# Altium PCB Põhiplaat.PcbDoc
Units mm, origin at the board's own origin, x right, y up, seen from the top; angles counter-clockwise.
Board outline 99 x 99 mm, 2 copper layers (Top Layer, Bottom Layer); 71 components, 98 nets, 428 pads, 89 vias.
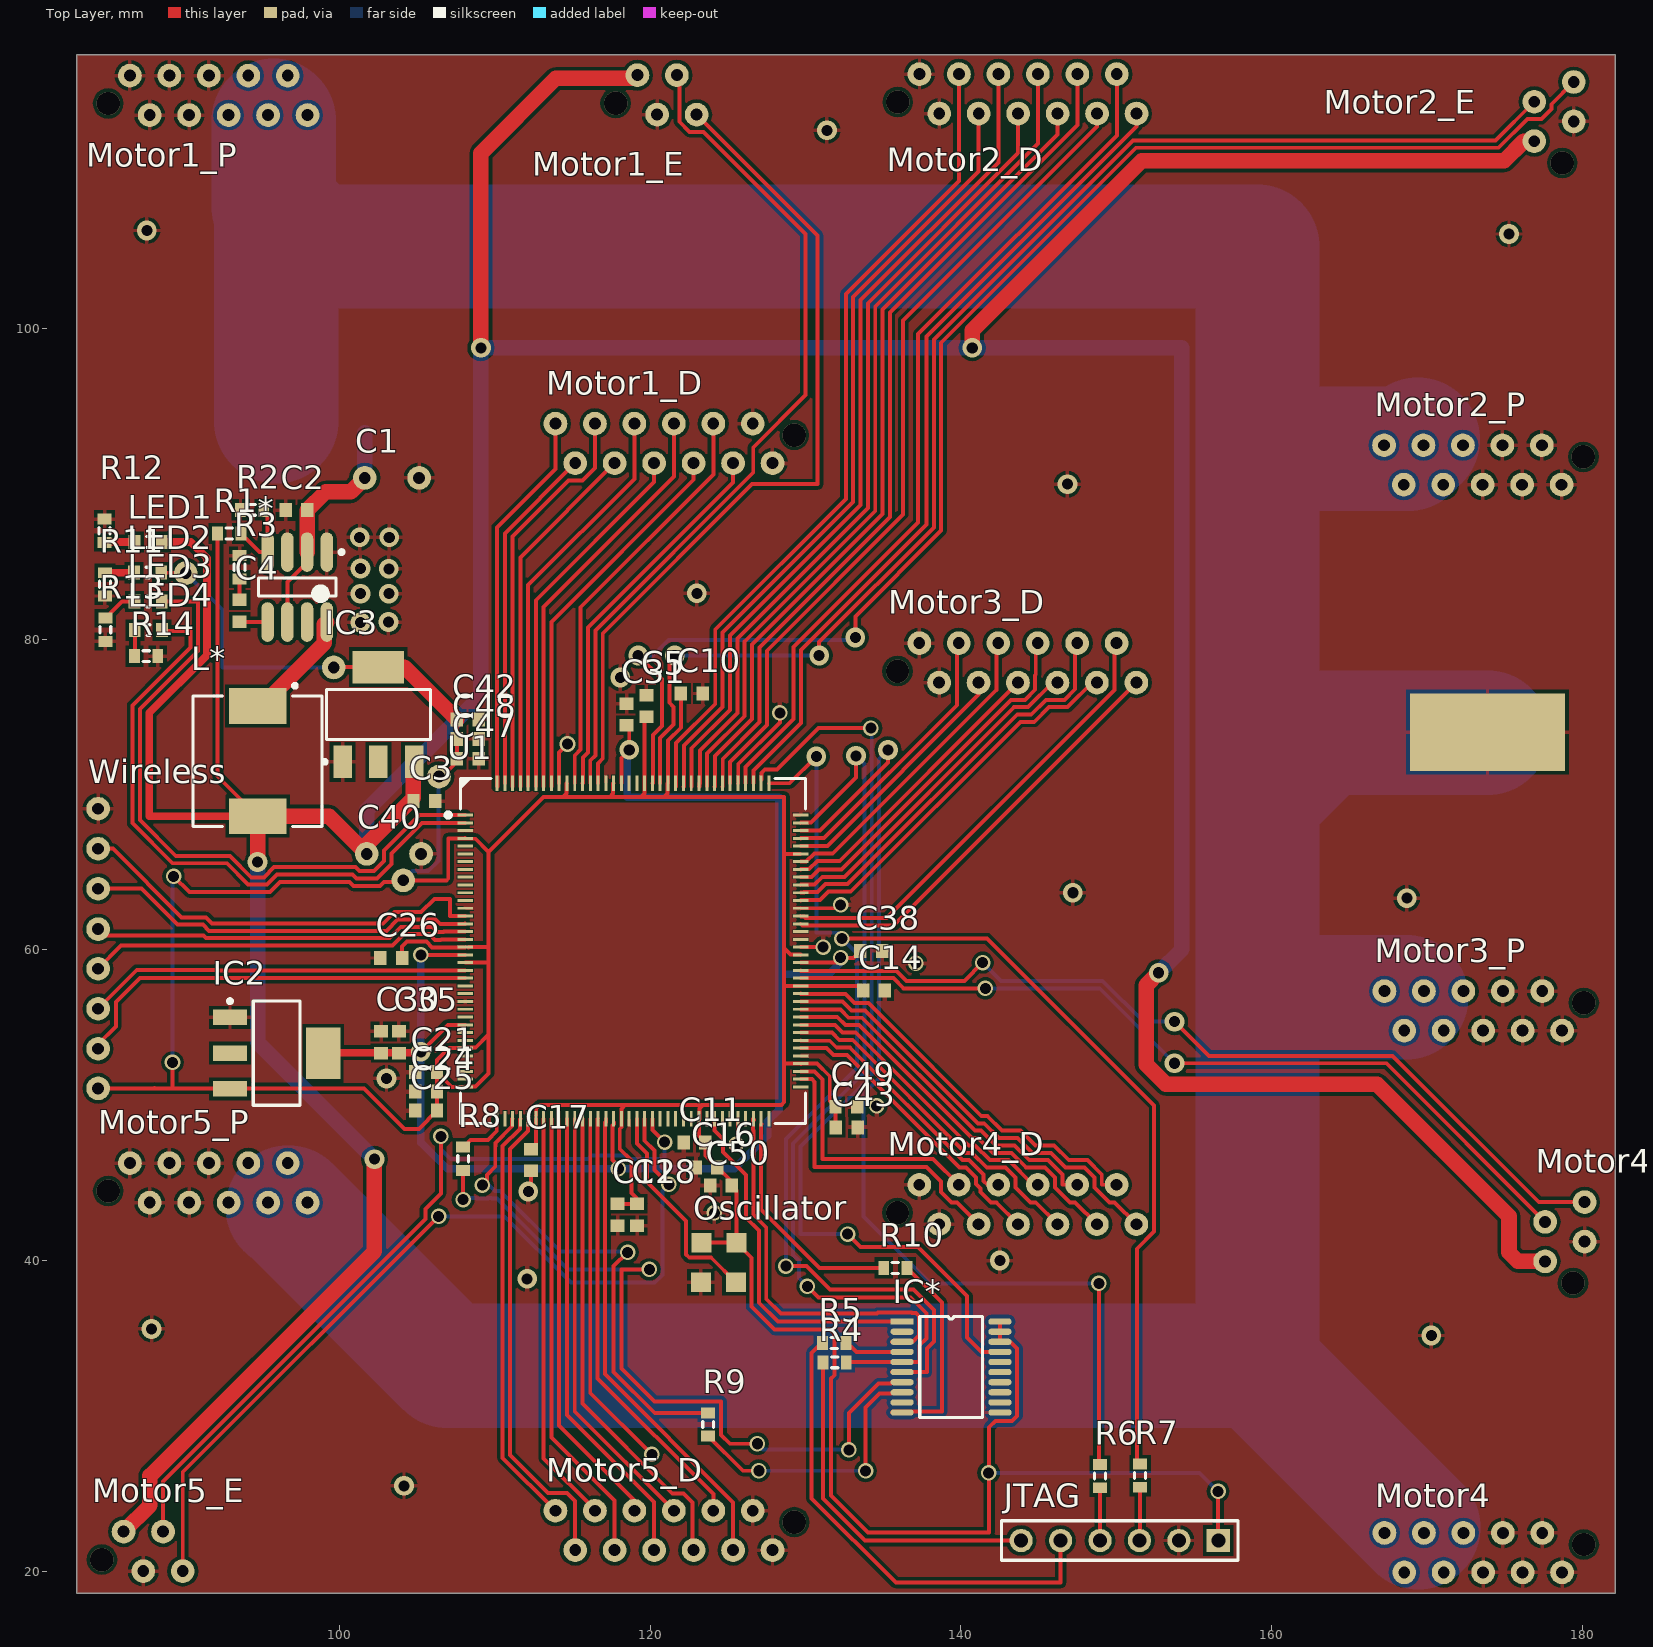
[diagram p0: Top Layer view]
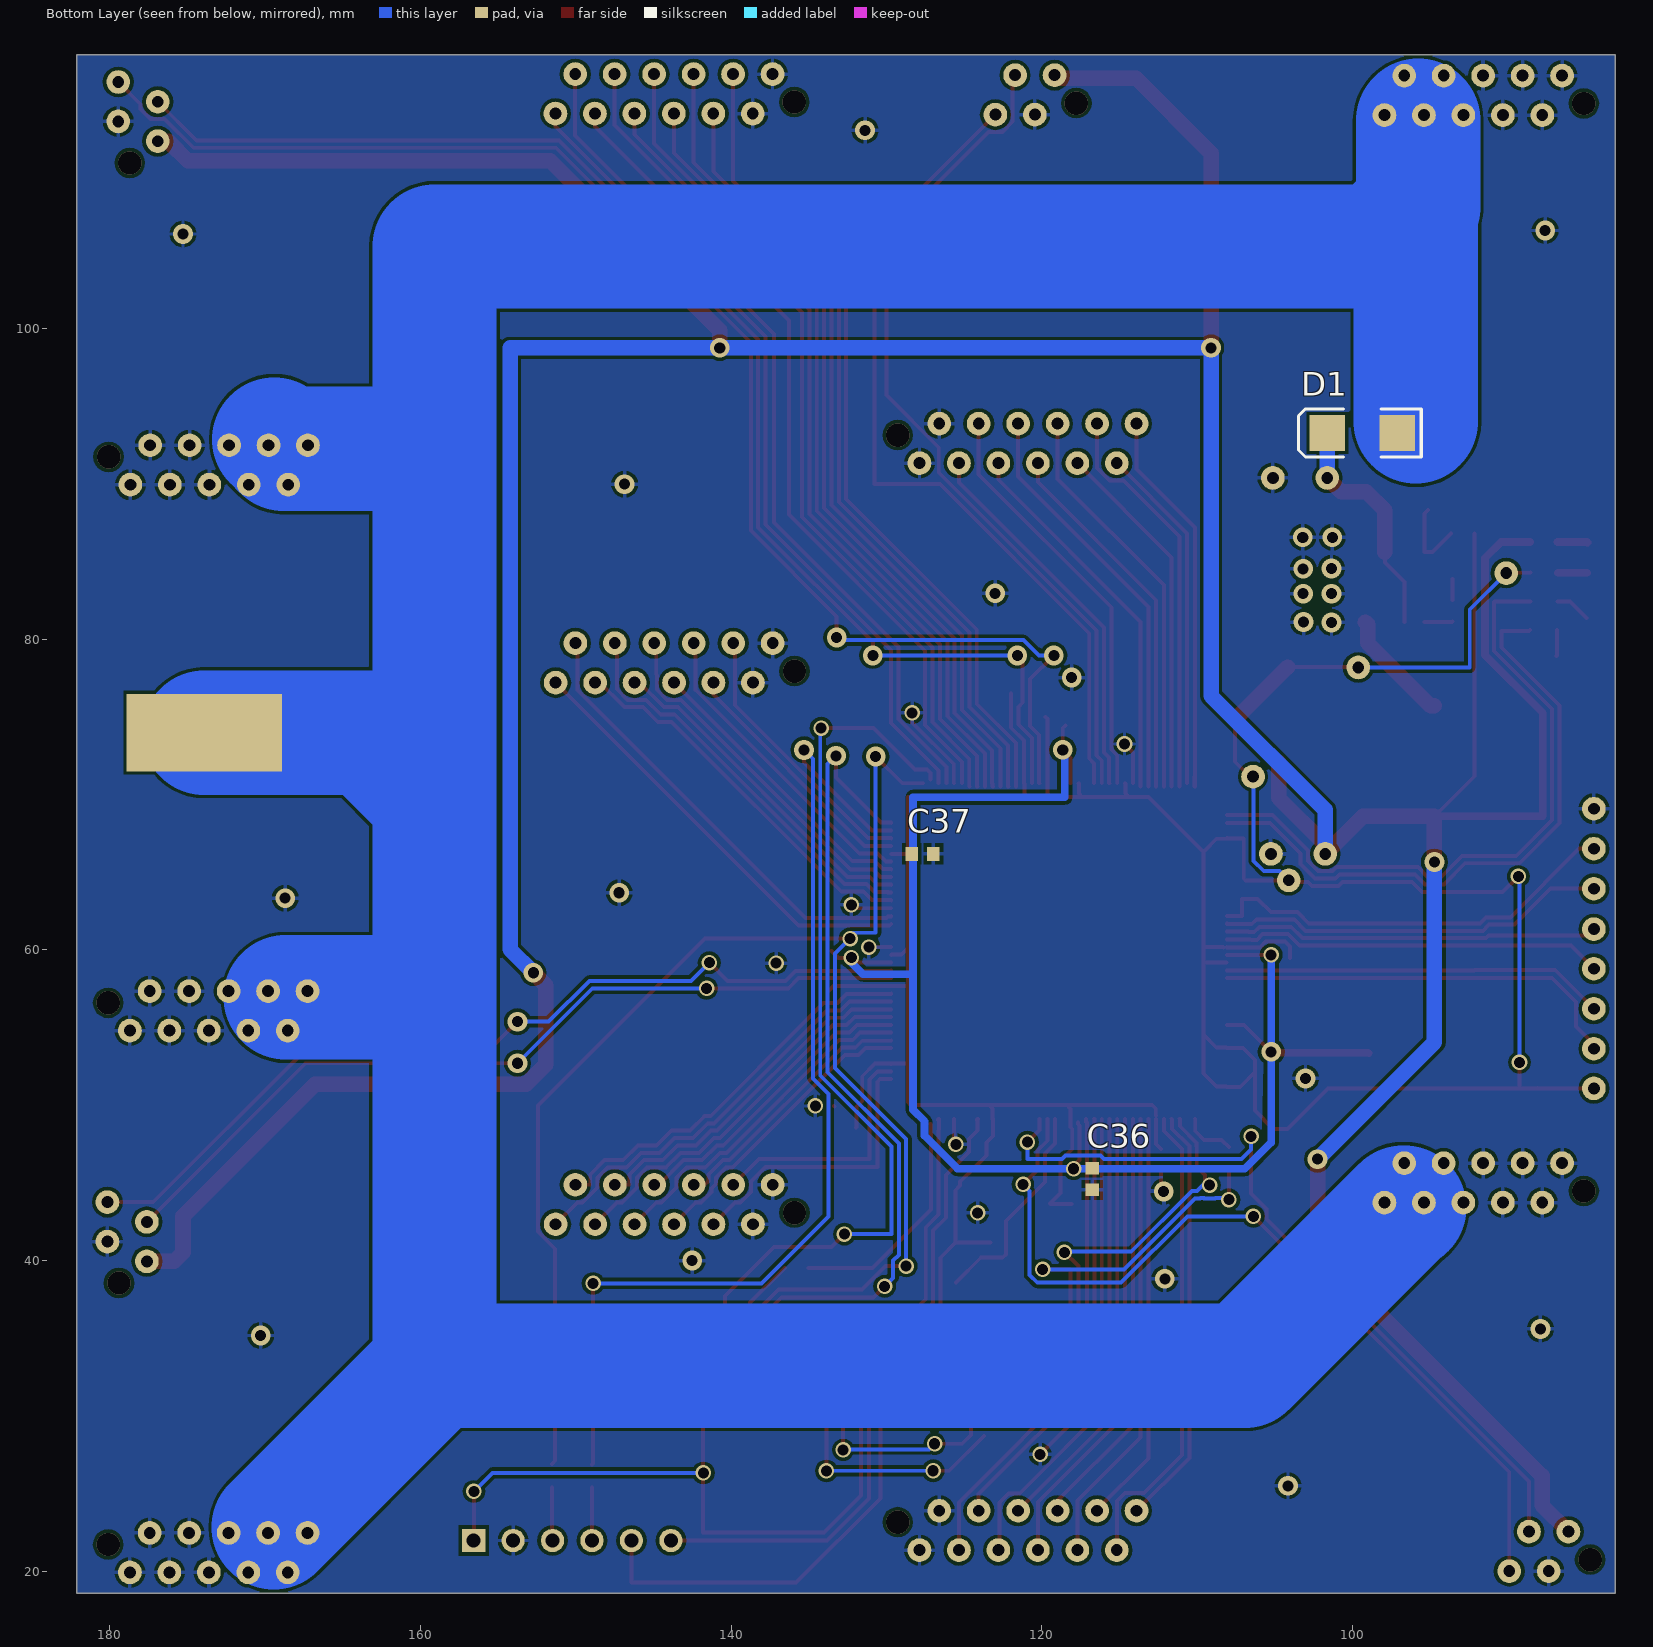
[diagram p1: Bottom Layer view, seen from below]

## Layer stack, top to bottom
Top Layer: signal copper 0.0356
Dielectric: dielectric 0.32, FR-4, Dk 4.8
Bottom Layer: signal copper 0.0356

## Board outline
83.1,117.6 182.1,117.6 182.1,18.6 83.1,18.6

## Design rules (kind name [scope] priority, off if disabled: settings)
Clearance "U1 clearance" [InComponent('U1')] p1: gap=0.05
Clearance [All] p2: gap=0.22
ComponentClearance [All] p1: gap=0.2 collisioncheckmode=3 verticalgap=0.2 showdistances=FALSE
DiffPairsRouting [All] p1: maxlimit=0.254 minlimit=0.1 mostfreqgap=0.1 maxuncoupledlength=12.7
HoleToHoleClearance [All] p1: gap=0.1 allowstackedmicrovias=TRUE
MinimumSolderMaskSliver [All] p1: minsoldermaskwidth=0.01
PolygonConnect [All] p1: connectstyle=Relief reliefconductorwidth=0.254 reliefentries=4 polygonreliefangle="90 Angle"
RoomDefinition Power [InComponentClass('Power')] p1: confinementstyle=ConfineIn formatcopy=TRUE lockcomponents=FALSE outline 0,0 50.8,0 50.8,25.4 0,25.4
RoomDefinition JTAG [InComponentClass('JTAG')] p2: confinementstyle=ConfineIn formatcopy=TRUE lockcomponents=FALSE outline 183.734,19.526 192.034,19.526 192.034,29.051 183.734,29.051
RoomDefinition BANK3 [InComponentClass('BANK3')] p3: confinementstyle=ConfineIn formatcopy=TRUE lockcomponents=FALSE outline 0,0 50.8,0 50.8,25.4 0,25.4
RoomDefinition BANK2 [InComponentClass('BANK2')] p4: confinementstyle=ConfineIn formatcopy=TRUE lockcomponents=FALSE outline 0,0 50.8,0 50.8,25.4 0,25.4
RoomDefinition BANK1 [InComponentClass('BANK1')] p5: confinementstyle=ConfineIn formatcopy=TRUE lockcomponents=FALSE outline 0,0 50.8,0 50.8,25.4 0,25.4
RoomDefinition BANK0 [InComponentClass('BANK0')] p6: confinementstyle=ConfineIn formatcopy=TRUE lockcomponents=FALSE outline 0,0 50.8,0 50.8,25.4 0,25.4
RoutingVias [All] p1: holewidth=0.711 width=1.27 viastyle="Through Hole" minholewidth=0.711 minwidth=1.27 maxholewidth=0.711 maxwidth=1.27
SilkscreenOverComponentPads [All] p1: minsilkscreentomaskgap=0.254
SolderMaskExpansion [All] p1: expansion=0.102
Width [All] p1: maxlimit=8 minlimit=0.254 preferedwidth=0.254 minimp=50.000000 maximp=50.000000 favimp=50.000000
23 further rules are at their usual default settings.

## Classes and differential pairs
component class Power: * C1 C2 C3 C4 C5 C10 C11 C12 C14 C16 C17 C18 C21 C24 C25 C26 C30 C31 C35 C36 C37 C38 C40 C42 C43 C47 C48 C49 C50 D1 IC2 IC3 L* LED1 LED2 Motor1_P Motor2_P Motor3_P Motor4 Motor5_P R1 R2 R3 R11 R12
component class JTAG: IC* JTAG R4 R5 R6 R7 R8 R9
component class BANK0: Motor1_D Motor1_E Motor2_D Motor2_E U1
component class BANK2: Motor5_D Motor5_E Oscillator R10
component class BANK3: LED3 LED4 R13 R14 Wireless
component class BANK1: Motor3_D Motor4_D Motor4_E

## Components (designator, comment, footprint, x,y, rotation, side; value= is the part's Value field where it differs from the comment)
* "NCP3170" NCP3170 97.275,83.35 r270 top
C1 "Cap Pol1" CAPACITOR 101.625,90.375 r0 top
C2 "Cap Semi" 1608[0603] 97.225,88.3 r0 top
C3 "Cap Semi" 1608[0603] 105.461,69.578 r180 top
C4 "Cap Semi" 1608[0603] 93.575,81.825 r270 top
C5 "Cap Semi" 1608[0603] 119.75,75.7 r270 top
C10 "Cap Semi" 1608[0603] 122.675,76.5 r180 top
C11 "Cap Semi" 1608[0603] 122.85,47.6 r0 top
C12 "Cap Semi" 1608[0603] 117.9,42.95 r90 top
C14 "Cap Semi" 1608[0603] 134.4,57.375 r180 top
C16 "Cap Semi" 1608[0603] 123.625,46 r0 top
C17 "Cap Semi" 1608[0603] 112.325,46.475 r90 top
C18 "Cap Semi" 1608[0603] 119.15,42.95 r90 top
C21 "Cap Semi" 1608[0603] 105.575,52.125 r0 top
C24 "Cap Semi" 1608[0603] 105.575,50.875 r0 top
C25 "Cap Semi" 1608[0603] 105.575,49.65 r0 top
C26 "Cap Semi" 1608[0603] 103.325,59.475 r0 top
C30 "Cap Semi" 1608[0603] 102.675,54.05 r270 top
C31 "Cap Semi" 1608[0603] 118.475,75.15 r270 top
C35 "Cap Semi" 1608[0603] 103.825,54.05 r270 top
C36 "Cap Semi" 1608[0603] 116.75,45.25 r90 bottom
C37 "Cap Semi" 1608[0603] 127.675,66.175 r0 bottom
C38 "Cap Semi" 1608[0603] 134.225,59.925 r180 top
C40 "Cap Pol1" CAPACITOR 101.75,66.175 r0 top
C42 "Cap Semi" 1608[0603] 108.25,74.825 r180 top
C43 "Cap Semi" 1608[0603] 132.65,48.575 r180 top
C47 "Cap Semi" 1608[0603] 108.25,72.3 r180 top
C48 "Cap Semi" 1608[0603] 108.25,73.575 r180 top
C49 "Cap Semi" 1608[0603] 132.625,49.9 r180 top
C50 "Cap Semi" 1608[0603] 124.55,44.825 r0 top
D1 "Schottky 1A" SMB 99.37,93.27 r0 bottom
IC2 "NX1117C" NX1117C 95.95,53.35 r0 top
IC3 "LMS8117" LMS8117 102.5,75.15 r90 top
IC* "XF04SVO20" XCF04SVOG20 135.56,36.07 r0 top
JTAG "Header 6" HDR1X6 156.57,21.98 r180 top
L* "Choke" CHOKE 94.725,72.15 r270 top
LED1 "LED 0603" LED 87.675,86.25 r0 top
LED2 "LED 0603" LED 87.65,84.275 r0 top
LED3 "Transmit" LED 87.675,82.425 r0 top
LED4 "Receive" LED 87.7,80.575 r0 top
Motor1_D "uMatchX12" UMATCHX12 113.9,93.87 r180 top
Motor1_E "uMatchx4" "MICROMATCH X4" 119.175,116.3 r0 top
Motor1_P "POWER" UMATCH10X 97.94,113.73 r180 top (schematic designator Motor1)
Motor2_D "uMatchX12" UMATCHX12 151.3,113.83 r0 top
Motor2_E "uMatchx4" "MICROMATCH X4" 176.9,112.05 r90 top
Motor2_P "POWER" UMATCH10X 167.23,92.48 r0 top (schematic designator Motor2)
Motor3_D "uMatchX12" UMATCHX12 151.29,77.2 r0 top
Motor3_P "POWER" UMATCH10X 167.26,57.34 r0 top (schematic designator Motor5)
Motor4 "POWER" UMATCH10X 167.26,22.47 r0 top
Motor4_D "uMatchX12" UMATCHX12 151.29,42.34 r0 top
Motor4_E "uMatchx4" "MICROMATCH X4" 177.6,39.95 r90 top
Motor5_D "uMatchX12" UMATCHX12 113.9,23.9 r180 top
Motor5_E "uMatchx4" "MICROMATCH X4" 86.1,22.55 r0 top
Motor5_P "POWER" UMATCH10X 97.94,43.73 r180 top (schematic designator Motor3)
Oscillator "Oscillator" OSC_FOOTPRINT 120.55,38.15 r270 top
R1 "Res3" J1-0603 92.9,86.8 r180 top
R2 "Res3" J1-0603 94.375,88.325 r0 top
R3 "Res3" J1-0603 93.575,84.625 r270 top
R4 "Res3" J1-0603 131.87,33.45 r0 top
R5 "Res3" J1-0603 131.84,34.7 r0 top
R6 "Res3" J1-0603 148.95,26.13 r90 top
R7 "Res3" J1-0603 151.53,26.16 r90 top
R8 "Res3" J1-0603 107.96,46.55 r270 top
R9 "Res3" J1-0603 123.73,29.45 r270 top
R10 "Res3" J1-0603 135.78,39.53 r0 top
R11 "Res3" J1-0603 84.9,83.525 r90 top
R12 "Res3" J1-0603 84.875,86.975 r270 top
R13 "Res3" J1-0603 84.925,80.6 r270 top
R14 "Res3" J1-0603 87.55,78.9 r0 top
U1 "XC6SLX9" XC6SLX9 116.35,61.45 r0 top
Wireless "Pinheader 2.54mm" "PINHEADER 2.54MM" 84.26,57.01 r90 top

## Footprints (in the part's own frame and the unit in brackets; to place one, negate y for a bottom-side part, rotate by r counter-clockwise, add the part's x,y. Pads: shape width x height; smd on the part's side, far side on the other; paste and mask are expansions set on the pad)
1608[0603] [mm] "Chip Capacitor, Body 1.6x0.8mm, IPC High Density"
  rect 0.8x0.9 smd: 1(-0.7,0) 2(0.7,0)
  body extent -0.87,-0.48 0.87,0.48, height 1.3
CAPACITOR [mil]
  round 60 hole 30: 1(0,0) 2(137.8,0)
CHOKE [mm] "Precision Wire Wound Inductor, 2-Leads, Body 8,2x8,2mm, IPC Medium Density"
  rect 2.3x3.7 smd: 1(-3.55,0) 2(3.55,0)
  silkscreen extent -4.97,-4.15 4.2,4.15, body extent -4.15,-4.15 4.15,4.15, height 2.29
HDR1X6 [mm] "Connector; Header; 6 Position"
  rect 1.5x1.5 hole 0.9: 1(0,0)
  round 1.5 hole 0.9: 2(2.54,0) 3(5.08,0) 4(7.62,0) 5(10.16,0) 6(12.7,0)
  silkscreen extent -1.27,-1.27 13.97,1.27
J1-0603 [mm] "Chip Resistor, Body 1.6x0.8mm, IPC High Density"
  rect 0.7x0.9 smd: 1(-0.75,0) 2(0.75,0)
  silkscreen extent -0.2,-0.35 0.2,0.35, body extent -0.85,-0.48 0.85,0.48, height 0.9
LED [mm] "LED 0603, SMD"
  rect 0.75x0.9 smd: 1(-0.875,0) 2(0.875,0)
  silkscreen extent -0.1,-0.35 0.1,0.35, body extent -0.8,-0.4 0.8,0.4, height 0.8
LMS8117 [mm] "LDO 5V ->3V3"
  rect 2.1x1.2 smd: 1(-3.05,2.3) 2(-3.05,0) 3(-3.05,-2.3)
  rect 2.1x3.3 smd: 4(3.05,0)
  silkscreen extent -3.17,-3.35 1.6,3.57, body extent -1.88,-3.35 1.88,3.35, height 1.55
"MICROMATCH X4" [mil] "Micromatch x4"
  round 60 hole 30: 1(0,0) 2(100,0) 3(50,-100) 4(150,-100)
NCP3170 [mm] "Voltage Regulator 18V-3V3"
  oval 2.55x0.8 smd: 1(-2.25,1.905) 2(-2.25,0.635) 3(-2.25,-0.635) 4(-2.25,-1.905) 5(2.25,-1.905) 6(2.25,-0.635) 7(2.25,0.635) 8(2.25,1.905)
  silkscreen extent -2.37,-2.5 0.72,2.98, body extent -2,-2.5 2,2.5, height 1.75
NX1117C [mm] "LDO 3V3->1.2V"
  rect 2.2x1 smd: 1(-3,2.3) 2(-3,0) 3(-3,-2.3)
  rect 2.2x3.3 smd: 4(3,0)
  silkscreen extent -3.12,-3.35 1.5,3.47, body extent -1.85,-3.35 1.85,3.35, height 1.8
OSC_FOOTPRINT [mm]
  rect 1.24x1.29 smd: 1(-3,2.75) 2(-0.45,2.71) 3(-0.45,4.96) 4(-3,5)
"PINHEADER 2.54MM" [mil]
  round 60 hole 30: 1(-233.27,-7.87) 2(-132.87,-7.87) 3(-31.5,-7.87) 4(69.88,-7.87) 5(170.28,-7.87) 6(272.64,-7.87) 7(374.02,-7.87) 8(475.39,-7.87)
SMB [mm] "DO-214-AA/SMB; 2 C-Bend Leads; Body 5.3 x 3.6 mm, inc. leads (LxW)"
  rect 2.3x2.3 smd: 1(-2.25,0) 2(2.25,0)
  silkscreen extent -3.8,-1.55 4.1,1.55
UMATCH10X [mil]
  round 60 hole 30: 1(0,0) 2(100,0) 3(200,0) 4(300,0) 5(400,0) 6(50,-100) 7(150,-100) 8(250,-100) 9(350,-100) 10(450,-100)
UMATCHX12 [mil]
  round 60 hole 30: 1(-550,100) 2(-450,100) 3(-350,100) 4(-250,100) 5(-150,100) 6(-50,100) 7(-500,0) 8(-400,0) 9(-300,0) 10(-200,0) 11(-100,0) 12(0,0)
XC6SLX9 [mm]
  rect 1.006x0.19 smd: 1(-8.257,7.226) 2(-8.257,6.726) 3(-8.257,6.226) 4(-8.257,5.726) 5(-8.257,5.226) 6(-8.257,4.726) 7(-8.257,4.226) 8(-8.257,3.726) 9(-8.257,3.226) 10(-8.257,2.726) 11(-8.257,2.226) 12(-8.257,1.726) 13(-8.257,1.226) 14(-8.257,0.726) 15(-8.257,0.226) 16(-8.257,-0.274) 17(-8.257,-0.774) 18(-8.257,-1.274) 19(-8.257,-1.774) 20(-8.257,-2.274) 21(-8.257,-2.774) 22(-8.257,-3.274) 23(-8.257,-3.774) 24(-8.257,-4.274) 25(-8.257,-4.774) 26(-8.257,-5.274) 27(-8.257,-5.774) 28(-8.257,-6.274) 29(-8.257,-6.774) 30(-8.257,-7.274) 31(-8.257,-7.774) 32(-8.257,-8.274) 33(-8.257,-8.774) 34(-8.257,-9.274) 35(-8.257,-9.774) 36(-8.257,-10.274) 73(13.337,-10.274) 74(13.337,-9.774) 75(13.337,-9.274) 76(13.337,-8.774) 77(13.337,-8.274) 78(13.337,-7.774) 79(13.337,-7.274) 80(13.337,-6.774) 81(13.337,-6.274) 82(13.337,-5.774) 83(13.337,-5.274) 84(13.337,-4.774) 85(13.337,-4.274) 86(13.337,-3.774) 87(13.337,-3.274) 88(13.337,-2.774) 89(13.337,-2.274) 90(13.337,-1.774) 91(13.337,-1.274) 92(13.337,-0.774) 93(13.337,-0.274) 94(13.337,0.226) 95(13.337,0.726) 96(13.337,1.226) 97(13.337,1.726) 98(13.337,2.226) 99(13.337,2.726) 100(13.337,3.226) 101(13.337,3.726) 102(13.337,4.226) 103(13.337,4.726) 104(13.337,5.226) 105(13.337,5.726) 106(13.337,6.226) 107(13.337,6.726) 108(13.337,7.226)
  rect 0.19x1.006 smd: 37(-6.21,-12.321) 38(-5.71,-12.321) 39(-5.21,-12.321) 40(-4.71,-12.321) 41(-4.21,-12.321) 42(-3.71,-12.321) 43(-3.21,-12.321) 44(-2.71,-12.321) 45(-2.21,-12.321) 46(-1.71,-12.321) 47(-1.21,-12.321) 48(-0.71,-12.321) 49(-0.21,-12.321) 50(0.29,-12.321) 51(0.79,-12.321) 52(1.29,-12.321) 53(1.79,-12.321) 54(2.29,-12.321) 55(2.79,-12.321) 56(3.29,-12.321) 57(3.79,-12.321) 58(4.29,-12.321) 59(4.79,-12.321) 60(5.29,-12.321) 61(5.79,-12.321) 62(6.29,-12.321) 63(6.79,-12.321) 64(7.29,-12.321) 65(7.79,-12.321) 66(8.29,-12.321) 67(8.79,-12.321) 68(9.29,-12.321) 69(9.79,-12.321) 70(10.29,-12.321) 71(10.79,-12.321) 72(11.29,-12.321) 109(11.29,9.273) 110(10.79,9.273) 111(10.29,9.273) 112(9.79,9.273) 113(9.29,9.273) 114(8.79,9.273) 115(8.29,9.273) 116(7.79,9.273) 117(7.29,9.273) 118(6.79,9.273) 119(6.29,9.273) 120(5.79,9.273) 121(5.29,9.273) 122(4.79,9.273) 123(4.29,9.273) 124(3.79,9.273) 125(3.29,9.273) 126(2.79,9.273) 127(2.29,9.273) 128(1.79,9.273) 129(1.29,9.273) 130(0.79,9.273) 131(0.29,9.273) 132(-0.21,9.273) 133(-0.71,9.273) 134(-1.21,9.273) 135(-1.71,9.273) 136(-2.21,9.273) 137(-2.71,9.273) 138(-3.21,9.273) 139(-3.71,9.273) 140(-4.21,9.273) 141(-4.71,9.273) 142(-5.21,9.273) 143(-5.71,9.273) 144(-6.21,9.273)
  silkscreen extent -9.51,-12.62 13.64,9.58
XCF04SVOG20 [mm]
  rect 1.5x0.4 smd: 1(0.65,0)
  oval 1.5x0.4 smd: 2(0.65,-0.65) 3(0.65,-1.3) 4(0.65,-1.95) 5(0.65,-2.6) 6(0.65,-3.25) 7(0.65,-3.9) 8(0.65,-4.55) 9(0.65,-5.2) 10(0.65,-5.85) 11(6.95,-5.85) 12(6.95,-5.2) 13(6.95,-4.55) 14(6.95,-3.9) 15(6.95,-3.25) 16(6.95,-2.6) 17(6.95,-1.95) 18(6.95,-1.3) 19(6.95,-0.65) 20(6.95,0)
  silkscreen extent 1.78,-6.18 5.82,0.33

## Part data
C1 C40: "Polarized Capacitor (Radial)"
C2 C3 C4 C5 C10 C11 C12 C14 C16 C17 C18 C21 C24 C25 C26 C30 C31 C35 C36 C37 C38 C42 C43 C47 C48 C49 C50: "Capacitor (Semiconductor SIM Model)"
D1: library part "D Schottky", "Schottky Diode"
JTAG: "Header, 6-Pin"
LED3 LED4: library part "LED 0603"
Motor1_P Motor2_P Motor3_P Motor4 Motor5_P: library part "uMatch 10x"
Oscillator: "Fox_osc_100MHz"
R1 R2 R3 R4 R5 R6 R7 R8 R9 R10 R11 R12 R13 R14: "Resistor"
U1: library part C6SLX9, "Imported"

## Free pads (board coordinates)
  round 1.524 hole 0.762: 0(99.625,78.175) 1(90.1,84.25) 2(106.4,71.15) 3(104.1,64.475)
  rect 10x5 smd: 0(173.89,74.01)
  rect 10x5 smd far side: 1(173.9,73.98)

## Via types
v1: diameter 1.27, hole 0.711, Top Layer to Bottom Layer, 39 vias
v2: diameter 1, hole 0.711, Top Layer to Bottom Layer, 36 vias
v3: diameter 1.5, hole 1.5, Top Layer to Bottom Layer, 14 vias

## Nets (pads, with @x,y where several pads share a name; then routed paths per layer and width w, separated by ;. In a path a pad name is that pad's centre, name@x,y a point inside that pad or via, vN(x,y) a via of type N, cw(c..) or ccw(c..) an arc to the next point about the centre after c; other vN are vias at no path point)
ACH1: Motor1_E.2 U1.132 | length 55.3
  Top Layer w0.254: U1.132 116.14,72.177 116.47,72.506 116.47,80.56 126.63,90.72 126.63,92.332 130.002,95.704 130.002,106.073 123.424,112.651 122.526,112.651 121.876,113.301 121.876,116.139 Motor1_E.2
ACH2: Motor2_E.2 U1.123 | length 86.5
  Top Layer w0.254: U1.123 120.64,73.632 121.501,74.493 121.501,75.633 121.228,75.906 121.228,78.603 v1(121.575,78.95) ; v1(130.875,78.95) 130.875,79.805 138.254,87.184 138.254,99.274 151.08,112.1 174.41,112.1 Motor2_E.2
  Bottom Layer w0.254: v1(121.575,78.95) v1(130.875,78.95)
ACH4: Motor4_E.2 U1.87 | length 54.4
  Top Layer w0.254: U1.87 135.654,58.176 136.304,57.526 v2(141.575,57.526) ; v1(153.75,52.7) 167.39,52.7 Motor4_E.2
  Bottom Layer w0.254: v2(141.575,57.526) 148.924,57.526 v1(153.75,52.7)
ACH5: Motor5_E.2 U1.57 | length 51.5
  Top Layer w0.254: Motor5_E.2 88.64,25.785 105.525,42.67 105.525,43.325 106.525,44.325 v2(106.525,48) ; U1.57 120.14,48.41 v2(120.925,47.625)
  Bottom Layer w0.254: v2(106.525,48) 106.525,47.159 107.152,46.532 115.991,46.532 116.216,46.757 118.471,46.757 118.696,46.532 120.925,46.532 v2(120.925,47.625)
BCH1: Motor1_E.4 U1.131 | length 54.6
  Top Layer w0.254: U1.131 116.64,72.006 116.944,72.31 116.944,80.363 126.557,89.976 130.775,89.976 130.775,105.97 Motor1_E.4
BCH2: Motor2_E.4 U1.124 | length 92.7
  Top Layer w0.254: v1(119.225,78.95) 120.75,77.425 120.75,74.412 120.166,73.828 120.166,70.749 U1.124 ; v1(133.2,80.1) 133.2,81.459 138.728,86.987 138.728,99.077 151.277,111.626 174.606,111.626 176.461,113.481 177.359,113.481 178.009,114.131 178.009,114.429 Motor2_E.4
  Bottom Layer w0.254: v1(119.225,78.95) 120.186,78.95 121.168,79.932 133.032,79.932 v1(133.2,80.1)
BCH4: Motor4_E.4 U1.88 | length 57.6
  Top Layer w0.254: U1.88 129.713,58.65 135.85,58.65 136.5,58 140.225,58 v2(141.4,59.175) ; v1(153.75,55.375) 155.951,53.174 167.776,53.174 177.19,43.76 Motor4_E.4
  Bottom Layer w0.254: v2(141.4,59.175) 142.575,58 149.12,58 151.745,55.375 v1(153.75,55.375)
BCH5: Motor5_E.4 U1.56 | length 56.9
  Top Layer w0.254: Motor5_E.4 89.91,26.385 v2(106.375,42.85) ; U1.56 119.64,47.712 120.274,47.078 120.274,45.826 v2(121.2,44.9)
  Bottom Layer w0.254: v2(106.375,42.85) 110.62,42.85 114.889,38.581 120.288,38.581 120.785,39.077 120.785,44.485 v2(121.2,44.9)
BRAKE1: Motor1_D.9 U1.138 | length 26.8
  Top Layer w0.254: U1.138@113.14,70.498 113.14,82.08 121.52,90.46 Motor1_D.9
BRAKE2: Motor2_D.9 U1.118 | length 51.8
  Top Layer w0.254: U1.118@123.14,70.498 123.166,70.524 123.166,70.694 123.192,70.72 123.192,72.832 125.607,75.247 125.607,80.038 134.008,88.439 134.008,101.619 143.68,111.291 Motor2_D.9
BRAKE3: Motor3_D.9 U1.101 | length 19
  Top Layer w0.254: U1.101 129.713,65.202 130.232,65.202 130.756,65.726 132.196,65.726 Motor3_D.9
BRAKE4: Motor4_D.9 U1.78 | length 19.1
  Top Layer w0.254: U1.78 131.357,53.676 131.807,53.226 132.674,53.226 139.911,45.989 140.319,45.989 140.969,45.339 140.969,44.931 141.257,44.643 141.257,44.407 141.927,43.737 142.273,43.737 Motor4_D.9
BRAKE5: Motor5_D.9 U1.47 | length 27.9
  Top Layer w0.254: U1.47 115.14,30.28 Motor5_D.9
CCLK: IC*.3 U1.70 | length 25.5
  Top Layer w0.254: IC*.3@135.56,34.77 IC*.3@135.629,34.839 ; IC*.3@135.76,34.77 136.884,34.77 137.307,35.193 137.307,36.414 137.104,36.617 136.854,36.617 136.82,36.651 134.652,36.651 134.585,36.584 128.414,36.584 127.468,37.53 127.468,42.134 126.65,42.952 126.65,48.386 126.616,48.42 U1.70@126.616,49.105 ; U1.70@126.616,49.105 U1.70 126.664,49.057 U1.70@126.616,49.105
CE: U1.22 Wireless.2 | length 26.6
  Top Layer w0.254: Wireless.2 84.46,53.924 85.603,55.067 85.603,56.635 87.16,58.192 U1.22@107.811,58.192 ; U1.22@107.827,58.176 U1.22
COAST1: Motor1_D.6 U1.143 | length 22.5
  Top Layer w0.254: U1.143@110.648,70.723 110.648,86.792 110.64,86.8 Motor1_D.6
COAST2: Motor2_D.6 U1.112 | length 55.5
  Top Layer w0.254: U1.112 126.14,71.758 129.226,74.844 129.226,79.496 137.245,87.515 137.245,99.645 150.03,112.43 Motor2_D.6
COAST3: Motor3_D.6 U1.95 | length 29.4
  Top Layer w0.254: U1.95 129.713,62.15 129.883,62.15 129.98,62.053 135.219,62.053 149.893,76.727 149.893,79.613 Motor3_D.6
COAST4: Motor4_D.6 U1.85 | length 25.8
  Top Layer w0.254: U1.85 129.713,57.15 132.575,57.15 133.147,56.578 134.047,56.578 135.114,55.511 135.103,55.511 141.307,49.307 141.694,49.307 142.642,48.359 143.841,48.359 144.789,47.411 145.988,47.411 146.936,46.463 148.136,46.463 149.063,45.536 149.063,44.891 149.074,44.88 Motor4_D.6
COAST5: Motor5_D.6 U1.41 | length 30.7
  Top Layer w0.254: U1.41 112.14,48.34 110.975,47.175 110.975,27.495 113.42,25.05 114.64,25.05 115.17,24.52 Motor5_D.6
CSN: U1.21 Wireless.3 | length 24.7
  Top Layer w0.254: Wireless.3 86.95,58.7 92.115,58.7 92.139,58.676 U1.21
CSOUT1: Motor1_D.8 U1.134 | length 26.8
  Top Layer w0.254: U1.134 115.14,72.517 115.522,72.899 115.522,82.052 124.06,90.59 Motor1_D.8
CSOUT2: Motor2_D.8 U1.120 | length 51.2
  Top Layer w0.254: U1.120@122.14,70.498 122.166,70.524 122.166,73.147 124.659,75.64 124.659,80.431 133.06,88.832 133.06,102.012 141.14,110.092 Motor2_D.8
CSOUT3: Motor3_D.8 U1.104 | length 16.3
  Top Layer w0.254: U1.104 130.606,66.676 130.622,66.692 131.4,66.692 141.13,76.422 Motor3_D.8
CSOUT4: Motor4_D.8 U1.74 | length 18.9
  Top Layer w0.254: U1.74 130.399,51.676 130.571,51.504 130.571,46.023 137.793,46.023 138.714,45.103 138.717,45.103 138.717,44.407 139.387,43.737 139.733,43.737 Motor4_D.8
CSOUT5: Motor5_D.8 U1.50 | length 28.3
  Top Layer w0.254: U1.50 116.614,49.103 116.614,32.411 124.06,24.965 Motor5_D.8
D_IN: IC*.1 U1.65 | length 22.2
  Top Layer w0.254: U1.65@124.164,49.057 U1.65 ; IC*.1@135.56,36.07 128.21,36.07 126.994,37.286 126.994,41.937 126.176,42.755 126.176,45.499 124.678,46.997 124.678,47.826 124.14,48.364 U1.65@124.14,49.081 ; U1.65@124.14,49.081 124.116,49.105 U1.65 ; U1.65@124.14,49.081 U1.65
DIR1: Motor1_D.3 U1.137 | length 24.6
  Top Layer w0.254: U1.137@113.64,70.498 113.64,81.11 122.79,90.26 Motor1_D.3
DIR2: Motor2_D.3 U1.119 | length 54.1
  Top Layer w0.254: U1.119@122.64,70.498 122.666,70.524 122.666,72.977 125.133,75.444 125.133,80.235 133.534,88.636 133.534,101.815 142.41,110.691 Motor2_D.3
DIR3: Motor3_D.3 U1.102 | length 20.2
  Top Layer w0.254: U1.102 130.035,65.676 130.559,66.2 131.746,66.2 142.273,76.727 142.273,79.613 Motor3_D.3
DIR4: Motor4_D.3 U1.79 | length 16.8
  Top Layer w0.254: U1.79 129.713,54.15 131.553,54.15 132.003,53.7 132.87,53.7 140.107,46.463 140.516,46.463 141.443,45.536 141.443,45.127 141.69,44.88 Motor4_D.3
DIR5: Motor5_D.3 U1.48 | length 31.1
  Top Layer w0.254: U1.48 115.64,30.787 121.418,25.009 122.141,25.009 122.725,24.425 Motor5_D.3@122.725,21.756 ; Motor5_D.3@122.509,21.641 Motor5_D.3
DIRO1: Motor1_D.12 U1.144 | length 25.6
  Top Layer w0.254: U1.144@110.14,70.498 110.14,87.18 113.9,90.94 Motor1_D.12 ; U1.144@110.164,70.522 U1.144@110.164,71.159
DIRO2: Motor2_D.12 U1.111 | length 53.3
  Top Layer w0.254: U1.111 126.64,71.54 129.7,74.6 129.7,79.3 137.78,87.38 137.78,99.47 151.3,112.99 Motor2_D.12
DIRO3: Motor3_D.12 U1.94 | length 28.1
  Top Layer w0.254: U1.94 129.784,61.579 135.669,61.579 Motor3_D.12
DIRO4: Motor4_D.12 U1.84 | length 27.9
  Top Layer w0.254: U1.84 132.379,56.676 132.951,56.104 133.818,56.104 141.089,48.833 141.497,48.833 142.445,47.885 143.645,47.885 144.593,46.937 145.792,46.937 146.74,45.989 147.939,45.989 148.589,45.339 148.589,44.695 149.547,43.737 149.893,43.737 Motor4_D.12
DIRO5: Motor5_D.12 U1.40 | length 27.1
  Top Layer w0.254: U1.40 111.606,49.095 111.606,48.476 110.501,47.371 110.501,27.299 Motor5_D.12
DONE: IC*.10 R10.2 | length 13.4
  Top Layer w0.254: IC*.10@135.56,30.22 135.629,30.289 138.769,30.289 138.769,37.291 R10.2
FF11: Motor1_D.10 U1.140 | length 26.2
  Top Layer w0.254: U1.140@112.14,70.498 112.14,83.47 118.98,90.31 Motor1_D.10
FF12: Motor2_D.10 U1.116 | length 52.5
  Top Layer w0.254: U1.116@124.14,70.498 124.166,70.524 124.166,72.466 126.555,74.855 126.555,79.646 134.956,88.047 134.956,101.226 146.22,112.49 Motor2_D.10
FF13: Motor3_D.10 U1.99 | length 21.9
  Top Layer w0.254: U1.99 129.713,64.202 130.572,64.202 131.071,64.701 132.512,64.701 143.428,75.617 144.326,75.617 145.909,77.2 Motor3_D.10
FF14: Motor4_D.10 U1.80 | length 22
  Top Layer w0.254: U1.80 131.697,54.676 132.165,54.208 133.033,54.208 140.304,46.937 140.712,46.937 141.66,45.989 142.859,45.989 143.509,45.339 143.509,44.695 144.467,43.737 144.813,43.737 Motor4_D.10
FF15: Motor5_D.10 U1.45 | length 27.2
  Top Layer w0.254: U1.45 114.14,29.385 118.98,24.545 Motor5_D.10
FF21: Motor1_D.5 U1.141 | length 23.3
  Top Layer w0.254: U1.141@111.64,70.498 111.64,85.26 Motor1_D.5
FF22: Motor2_D.5 U1.115 | length 55.3
  Top Layer w0.254: U1.115@124.64,70.498 124.666,70.524 124.666,72.295 127.029,74.658 127.029,79.449 135.43,87.85 135.43,101.03 147.49,113.09 Motor2_D.5
FF23: Motor3_D.5 U1.98 | length 26.1
  Top Layer w0.254: U1.98 129.713,63.702 129.883,63.702 129.909,63.728 130.769,63.728 131.268,64.227 132.708,64.227 143.624,75.143 144.522,75.143 145.47,76.091 146.669,76.091 147.353,76.775 147.353,79.613 Motor3_D.5
FF24: Motor4_D.5 U1.83 | length 22.8
  Top Layer w0.254: U1.83 129.713,56.15 132.234,56.15 132.754,55.63 133.622,55.63 140.893,48.359 141.301,48.359 142.249,47.411 143.448,47.411 144.396,46.463 145.596,46.463 146.523,45.536 146.523,44.891 146.534,44.88 Motor4_D.5
FF25: Motor5_D.5 U1.44 | length 29.5
  Top Layer w0.254: U1.44 113.64,28.62 117.71,24.55 Motor5_D.5
GND: *.1 *.3 C1.2 C2.1 C3.1 C5.1 C10.1 C11.1 C12.1 C14.1 C16.1 C17.1 C18.1 C21.1 C24.1 C25.1 C26.1 C30.1 C31.1 C35.1 C36.1 C37.1 C38.1 C40.2 C42.1 C43.1 C47.1 C48.1 C49.1 C50.1 IC2.1 IC3.1 IC*.11 JTAG.2 Motor1_D.1 Motor1_D.7 Motor1_E.3 Motor1_P.4 Motor1_P.5 Motor1_P.8 Motor1_P.9 Motor1_P.10 Motor2_D.1 Motor2_D.7 Motor2_E.3 Motor2_P.4 Motor2_P.5 Motor2_P.8 Motor2_P.9 Motor2_P.10 Motor3_D.1 Motor3_D.7 Motor3_P.4 Motor3_P.5 Motor3_P.8 Motor3_P.9 Motor3_P.10 Motor4.4 Motor4.5 Motor4.8 Motor4.9 Motor4.10 Motor4_D.1 Motor4_D.7 Motor4_E.3 Motor5_D.1 Motor5_D.7 Motor5_E.3 Motor5_P.4 Motor5_P.5 Motor5_P.8 Motor5_P.9 Motor5_P.10 Oscillator.2 pad.0@173.89,74.01 R2.1 R3.1 R11.1 R12.1 R13.2 R14.2 U1.3 U1.13 U1.25 U1.49 U1.54 U1.68 U1.77 U1.91 U1.96 U1.108 U1.113 U1.130 U1.136 Wireless.8 | length 39.2
  Top Layer w0.254: v1(112.15,44.45) 112.325,44.625 C17.1 ; U1.136 114.14,72.715 v2(114.675,73.25) ; U1.49 116.14,31.485 v2(120.1,27.525) ; v2@125.2,47.275 125.64,47.715 U1.68 ; U1.113 125.666,70.749 125.666,71.955 128.35,74.639 v2(128.35,75.25) ; U1.91 130.824,60.176 v2@131,60 ; U1.96 132.026,62.676 v2(132.25,62.9) ; C49.1 C49.1@133.375,49.95
  other v1: 104.15,25.5 170.275,35.175 87.9,35.6 112.075,38.825 142.5,40 103.025,51.725 168.7,63.325 147.2,63.675 118.075,77.525 101.35,81.075 103.15,81.1 101.35,82.925 103.175,82.925 123,82.95 103.175,84.525 101.35,84.55 101.3,86.55 103.2,86.55 146.85,89.975 175.275,106.075 87.6,106.3 131.375,112.75
  other v2: 124.125,43.075 125.525,47.475 134.575,49.95 137.1,59.15 131.125,60.175
INIT_B: R9.1 U1.39 | length 31.5
  Top Layer w0.254: v2(109.198,44.852) 109.488,45.142 109.488,45.519 110.025,46.056 110.025,47.377 110.027,47.379 110.027,47.568 111.116,48.657 111.116,49.113 U1.39@111.132,49.129 ; v2(118.54,40.53) 117.648,39.638 117.648,32.84 120.288,30.2 R9.1
  Bottom Layer w0.254: v2(109.198,44.852) 109.628,44.852 110.001,44.479 110.331,44.479 114.24,40.57 v2@118.58,40.57
IRQ: U1.14 Wireless.7 | length 27.4
  Top Layer w0.254: Wireless.7 85.41,66.51 89.827,62.093 91.404,62.093 91.8,61.697 102.816,61.697 103.548,62.429 105.258,62.429 106.103,63.274 107.1,63.274 107.1,62.176 U1.14
MCLK: Oscillator.3 U1.55 | length 14
  Top Layer w0.254: U1.55 119.14,47.542 119.8,46.882 119.8,45.05 122.308,42.542 122.308,40.386 122.511,40.183 123.927,40.183 Oscillator.3
MISO: U1.15 Wireless.6 | length 25.2
  Top Layer w0.254: Wireless.6 87.267,63.935 89.583,61.619 91.208,61.619 91.603,61.223 103.012,61.223 103.744,61.955 106.178,61.955 106.483,61.65 106.922,61.65 106.932,61.66 108.045,61.66 108.077,61.692 U1.15
MOSI: U1.16 Wireless.5 | length 24.3
  Top Layer w0.254: Wireless.5 84.87,60.925 91.231,60.925 91.407,60.749 103.208,60.749 103.94,61.481 105.982,61.481 106.331,61.131 106.35,61.15 106.705,61.15 106.731,61.176 U1.16
Net*_2: *.2 *.6 C1.1 C2.2 D1.2 | length 15.2
  Top Layer w0.254: *.6 96.64,83.669 97.91,84.939 *.2 ; C2.2@97.91,88.06 C2.2@98.125,88.275
  Top Layer w1: *.2 C2.2@97.91,88.06 ; C2.2 99.1,89.475 100.725,89.475 C1.1
  Bottom Layer w0.254: C1.1@101.62,90.38 C1.1
  Bottom Layer w1: C1.1@101.62,90.38 D1.2
Net*_4: *.4 R1.1 R2.2 | length 5
  Top Layer w0.254: R1.1 94.85,85.6 *.4 95.37,88.08 R2.2
Net*_5: *.5 C4.2 | length 1.8
  Top Layer w0.254: C4.2 93.6,81.1 *.5
Net*_8: *.8 L*.1 | length 7.4
  Top Layer w1: L*.1 94.969,75.7 99.03,79.761 99.03,80.95 *.8
NetC4_1: C4.1 R3.2 | length 1.4
  Top Layer w0.254: C4.1 R3.2
NetIC*_7: IC*.7 R8.2 | length 47.5
  Top Layer w0.254: v2(107.96,43.92) R8.2@107.96,45.77 ; v2(119.938,39.428) 118.156,39.428 118.156,33.051 120.276,30.931 124.561,30.931 124.561,28.77 125.121,28.21 v2(126.9,28.21) ; v2(132.78,27.82) 132.78,30.18 134.701,32.101 135.491,32.101 IC*.7@135.56,32.17
  Bottom Layer w0.254: v2(107.96,43.92) 108.06,44.02 108.832,44.02 108.847,44.005 109.549,44.005 109.563,44.02 109.79,44.02 109.805,44.005 110.135,44.005 114.712,39.428 v2(119.938,39.428) ; v2(126.9,28.21) 127.26,27.85 v2@132.34,27.85
NetIC*_8: IC*.8 R9.2 | length 17.3
  Top Layer w0.254: R9.2 125.96,26.47 v2(126.99,26.47) ; v2(133.86,26.46) 133.86,30.542 134.769,31.451 135.491,31.451 IC*.8@135.56,31.52
  Bottom Layer w0.254: v2(126.99,26.47) v2@133.91,26.47
NetJTAG_3: JTAG.3 R7.1 | length 3.4
  Top Layer w0.254: JTAG.3 151.53,22.02 R7.1
NetJTAG_4: JTAG.4 R6.1 | length 3.4
  Top Layer w0.254: JTAG.4 R6.1
NetJTAG_5: JTAG.5 R5.1 | length 31.3
  Top Layer w0.254: R5.1 131.031,34.7 130.389,34.058 130.389,24.691 135.81,19.27 146.42,19.27 146.41,19.28 JTAG.5
NetJTAG_6: JTAG.6 R4.1 | length 22.6
  Top Layer w0.254: R4.1 131.12,24.678 133.818,21.98 JTAG.6
NetLED1_1: LED1.1 R12.2 | length 1.9
  Top Layer w0.5: R12.2 84.9,86.25 LED1.1
NetLED2_1: LED2.1 R11.2 | length 1.9
  Top Layer w0.5: R11.2 LED2.1
NetLED3_1: LED3.1 R13.1 | length 2.3
  Top Layer w0.254: R13.1 86,82.425 LED3.1
NetLED3_2: LED3.2 U1.1 | length 42.7
  Top Layer w0.254: LED3.2 90.853,82.425 90.878,82.4 90.878,79.222 87.153,75.497 87.153,68.353 89.46,66.046 92.94,66.046 94.318,64.668 95.132,64.668 95.787,65.323 101.034,65.323 101.291,65.066 102.209,65.066 102.859,65.716 102.859,66.384 105.151,68.676 U1.1
NetLED4_1: LED4.1 R14.1 | length 1.7
  Top Layer w0.254: LED4.1 86.825,78.95 R14.1@86.875,78.9
NetLED4_2: LED4.2 U1.2 | length 41.1
  Top Layer w0.254: LED4.2 88.625,80.525 90.404,80.525 90.404,79.454 86.679,75.729 86.679,68.156 89.263,65.572 92.744,65.572 94.122,64.194 95.328,64.194 95.983,64.849 100.837,64.849 101.094,64.592 102.406,64.592 103.333,65.519 103.333,66.188 105.321,68.176 U1.2
NetR10_1: R10.1 U1.71 | length 15
  Top Layer w0.254: U1.71@127.164,48.777 127.124,48.737 127.124,43.29 130.884,39.53 R10.1
PROG_B: R8.1 U1.37 | length 3.4
  Top Layer w0.254: R8.1 108.424,47.764 109.553,47.764 110.12,48.331 110.12,49.109 U1.37
PWM1: Motor1_D.2 U1.133 | length 24.6
  Top Layer w0.254: U1.133 115.664,70.747 115.664,72.371 115.996,72.703 115.996,80.756 125.33,90.09 Motor1_D.2
PWM2: Motor2_D.2 U1.121 | length 53.4
  Top Layer w0.254: U1.121@121.64,70.498 121.666,70.524 121.666,73.317 124.185,75.836 124.185,80.627 132.586,89.028 132.586,102.208 139.87,109.492 Motor2_D.2
PWM3: Motor3_D.2 U1.105 | length 17.6
  Top Layer w0.254: U1.105 129.711,67.2 131.19,67.2 139.733,75.743 139.733,79.613 Motor3_D.2
PWM4: Motor4_D.2 U1.75 | length 16.2
  Top Layer w0.254: U1.75 130.569,52.176 131.079,51.666 131.079,46.531 138.209,46.531 Motor4_D.2
PWM5: Motor5_D.2 U1.51 | length 31.2
  Top Layer w0.254: U1.51 117.14,48.929 117.088,48.877 117.088,32.682 117.14,32.63 125.33,24.44 Motor5_D.2
RESET1: Motor1_D.11 U1.142 | length 26.1
  Top Layer w0.254: U1.142@111.14,70.498 111.14,86.616 114.735,90.211 115.634,90.211 116.44,91.018 Motor1_D.11
RESET2: Motor2_D.11 U1.114 | length 52.9
  Top Layer w0.254: U1.114 125.14,72.099 127.503,74.462 127.503,79.253 136.27,88.02 136.27,100.5 148.76,112.99 Motor2_D.11
RESET3: Motor3_D.11 U1.97 | length 24.9
  Top Layer w0.254: U1.97 129.713,63.202 130.913,63.202 131.464,63.753 132.904,63.753 143.82,74.669 144.718,74.669 145.666,75.617 146.866,75.617 148.449,77.2 Motor3_D.11
RESET4: Motor4_D.11 U1.82 | length 25
  Top Layer w0.254: U1.82 132.038,55.676 132.558,55.156 133.425,55.156 140.696,47.885 141.105,47.885 142.053,46.937 143.252,46.937 144.2,45.989 145.399,45.989 146.049,45.339 146.049,44.695 147.007,43.737 147.353,43.737 Motor4_D.11
RESET5: Motor5_D.11 U1.43 | length 26.6
  Top Layer w0.254: U1.43 113.14,27.268 116.44,23.968 Motor5_D.11
SCK: U1.17 Wireless.4 | length 24.7
  Top Layer w0.254: Wireless.4 85.947,60.272 103.402,60.272 104.137,61.007 105.785,61.007 106.158,60.634 106.505,60.634 106.547,60.676 U1.17
TACHO1: Motor1_D.4 U1.139 | length 24
  Top Layer w0.254: U1.139@112.64,70.498 112.64,82.5 120.25,90.11 Motor1_D.4
TACHO2: Motor2_D.4 U1.117 | length 54.7
  Top Layer w0.254: U1.117@123.64,70.498 123.666,70.524 123.666,72.636 126.081,75.051 126.081,79.842 134.482,88.243 134.482,101.423 144.95,111.891 Motor2_D.4
TACHO3: Motor3_D.4 U1.100 | length 23.2
  Top Layer w0.254: U1.100 130.376,64.676 130.875,65.175 132.315,65.175 143.231,76.091 144.129,76.091 144.779,76.741 144.779,77.659 144.769,77.669 144.813,77.713 144.813,79.613 Motor3_D.4
TACHO4: Motor4_D.4 U1.81 | length 19.5
  Top Layer w0.254: U1.81 129.713,55.15 131.894,55.15 132.362,54.682 133.229,54.682 140.5,47.411 140.908,47.411 141.856,46.463 143.056,46.463 144.639,44.88 Motor4_D.4
TACHO5: Motor5_D.4 U1.46 | length 30.1
  Top Layer w0.254: U1.46 114.64,30.06 120.25,24.45 Motor5_D.4
TCK: IC*.6 R7.2 U1.109 | length 105.4
  Top Layer w0.254: U1.109 128.973,70.723 v1(130.69,72.44) ; v2(128.727,39.647) 130.049,39.647 131.566,38.13 136.931,38.13 138.255,36.806 138.255,34.801 137.805,34.351 137.805,32.82 IC*.6@135.76,32.82 ; v2(132.331,60.728) 141.672,60.728 152.433,49.967 152.433,41.867 151.325,40.759 151.325,27.115 R7.2 ; IC*.6@135.56,32.82 IC*.6@135.629,32.889
  Bottom Layer w0.254: v2(128.727,39.647) 128.727,47.827 133.308,52.408 133.308,59.751 v2(132.331,60.728) ; v1(130.69,72.44) 130.69,61.1 132.187,61.1 v2@132.331,60.956
TDI: IC*.4 R5.2 | length 3.2
  Top Layer w0.254: R5.2 132.709,34.7 133.289,34.12 IC*.4@135.56,34.12
TDO: R6.2 U1.106 | length 67.6
  Top Layer w0.254: U1.106 130.916,67.676 135.3,72.06 v1(135.3,72.87) ; v2(148.88,38.53) 148.88,26.95 R6.2
  Bottom Layer w0.254: v1(135.3,72.87) 134.73,72.3 134.73,51.729 133.728,50.727 133.728,42.842 138.04,38.53 v2(148.88,38.53) v2@148.95,38.6
TDOF: IC*.17 U1.110 | length 60.7
  Top Layer w0.254: U1.110@127.148,70.949 127.164,70.965 127.164,71.394 127.37,71.6 128.15,71.6 130.825,74.275 v2(134.2,74.275) ; v2(132.7,41.7) 133.531,40.869 137.248,40.869 140.394,37.723 140.394,35.056 141.33,34.12 IC*.17
  Bottom Layer w0.254: v2(132.7,41.7) 129.675,41.7 129.675,47.344 134.256,51.926 134.256,74.219 v2(134.2,74.275)
TMS: IC*.5 R4.2 U1.107 | length 59
  Top Layer w0.254: U1.107 129.711,68.2 130.348,68.2 133.24,71.092 v1(133.24,72.49) ; v2(130.11,38.34) 130.828,37.622 136.769,37.622 137.781,36.61 137.781,34.997 137.331,34.547 137.331,33.47 IC*.5@135.76,33.47 ; R4.2 132.64,33.47 IC*.5@135.56,33.47
  Bottom Layer w0.254: v2(130.11,38.34) 129.574,38.876 129.574,39.998 129.201,40.371 129.201,47.541 133.782,52.122 133.782,71.948 v1(133.24,72.49)
VCC1V2: C30.2 C31.2 C35.2 C36.2 C37.2 C38.2 IC2.4 U1.19 U1.28 U1.52 U1.89 U1.128 | length 99.5
  Top Layer w0.254: 100.275,53.38 100.331,53.436 ; v1(105.234,53.436) 106.974,55.176 U1.28 ; v2(105.234,59.676) U1.19 ; U1.52@117.664,48.887 117.664,48.782 117.562,48.68 117.562,46.468 v2@118.12,45.91 ; U1.128 118.14,72.365 v1(118.65,72.875) 118.65,74.275 C31.2 ; U1.89 v2@131.951,59.176 ; v2(132.256,59.503) 132.256,59.481 132.25,59.475 133.075,59.475 C38.2
  Top Layer w0.5: IC2.4 98.98,53.38 100.275,53.38 105.178,53.38 v1(105.234,53.436)
  Bottom Layer w0.254: 128.29,58.225 128.493,58.428
  Bottom Layer w0.5: v2(105.234,59.676) v1(105.234,53.436) 105.234,47.606 106.93,45.91 125.415,45.91 127.542,48.038 127.542,48.957 128.29,49.705 128.29,58.225 128.29,69.82 118.519,69.82 118.519,72.744 v1(118.65,72.875) ; 128.493,58.428 131.503,58.428 132.25,59.175 132.25,59.496 v2(132.256,59.503)
  other v2: 117.95,45.91
VCC3V3: C5.2 C10.2 C11.2 C12.2 C14.2 C16.2 C17.2 C18.2 C21.2 C24.2 C25.2 C26.2 C42.2 C43.2 C47.2 C48.2 C49.2 C50.2 IC2.3 IC3.4 IC*.18 IC*.19 IC*.20 JTAG.1 LED2.2 Oscillator.1 Oscillator.4 pad.0@99.625,78.175 pad.1@90.1,84.25 pad.2 pad.3 U1.4 U1.18 U1.20 U1.31 U1.36 U1.42 U1.53 U1.63 U1.76 U1.86 U1.90 U1.103 U1.122 U1.125 U1.129 U1.135 Wireless.1 | length 306.4
  Top Layer w0.254: Wireless.1 88.07,51.085 ; 88.1,51.115 88.07,51.085 ; LED2.2 pad.1@90.1,84.25 ; v2(89.25,52.75) 89.25,51.085 ; v2(89.325,64.725) 90.33,63.72 95.524,63.72 96.179,64.375 100.641,64.375 100.898,64.118 102.602,64.118 102.859,64.375 104,64.375 pad.3 106.9,64.475 107,64.575 107,67.176 U1.4 ; pad.0@99.625,78.175 99.65,78.2 IC3.4 104.175,78.2 ; C26.2 104.025,60.225 104.333,60.533 105.589,60.533 105.962,60.16 108.077,60.16 U1.18 ; pad.2@107,71.557 107.55,72.107 C47.2 C48.2 C42.2 ; U1.4@108.069,67.2 U1.4 ; U1.20 109.596,59.176 ; U1.18@108.311,60.152 108.345,60.186 109.596,60.186 ; C17.2 112.64,47.49 U1.42 ; U1.42@112.64,49.347 112.664,49.371 112.664,49.79 112.887,50.013 118.387,50.013 ; U1.135@114.632,70.723 114.616,70.707 114.616,70.062 114.393,69.839 ; U1.129 117.616,70.699 117.616,70.062 117.393,69.839 ; C12.2@118.075,43.65 119.45,43.65 119.475,43.675 118.8,44.35 118.8,46.428 118.036,47.192 118.036,48.484 118.138,48.586 118.138,49.127 U1.53 118.14,49.766 118.387,50.013 ; C5.2 119.64,74.89 U1.125 119.616,70.699 119.616,70.062 119.393,69.839 ; U1.122@121.132,70.723 121.116,70.707 121.116,70.062 120.893,69.839 ; U1.122 121.14,73.462 121.975,74.297 C10.2 ; U1.63@123.164,49.105 U1.63 ; Oscillator.1 Oscillator.4 ; U1.90 129.663,59.7 129.026,59.7 128.619,60.107 ; U1.103 128.62,66.176 128.619,66.175 ; U1.76@129.713,52.65 U1.76 ; C43.2 131.925,48.6 C49.2 131.553,50.272 131.553,51.863 130.74,52.676 U1.76 ; C14.2 133.399,57.676 128.62,57.676 128.619,57.675 ; IC*.20 IC*.19 IC*.18 143.191,34.77 143.607,34.354 143.607,29.993 143.287,29.673 142.213,29.673 141.81,29.27 141.81,22.488 134.029,22.488 131.628,24.889 131.628,32.396 131.851,32.619 131.851,35.278 131.567,35.562 128,35.562 126.52,37.042 126.52,40.18 Oscillator.4 ; v2(156.55,25.14) 156.55,22 JTAG.1 ; 88.07,51.085 89.25,51.085 ; 89.25,51.085 101.572,51.085 104.177,48.48 105.105,48.48 C25.2 C24.2 C21.2 ; C21.2 107.224,51.176 U1.36 108.117,51.2 108.754,51.2 109.596,52.042 109.596,54.542 ; C21.2 106.275,52.9 107.051,53.676 U1.31 108.117,53.7 108.754,53.7 109.596,54.542 ; U1.4 108.117,67.152 108.754,67.152 109.596,66.31 ; 109.596,54.542 109.596,59.176 ; 109.596,59.176 109.596,60.186 ; 109.596,60.186 109.596,66.31 ; 109.596,66.31 113.125,69.839 114.393,69.839 ; 114.393,69.839 117.393,69.839 ; 117.393,69.839 119.393,69.839 ; 118.387,50.013 123.387,50.013 ; 119.393,69.839 120.893,69.839 ; 120.893,69.839 128.619,69.839 128.619,66.175 ; U1.63 123.14,48.01 C11.2 123.55,46.775 C16.2 125.25,45.075 C50.2 125.55,44.525 Oscillator.4 ; U1.63 123.164,49.153 123.164,49.79 123.387,50.013 ; 123.387,50.013 128.443,50.013 128.619,50.189 128.619,52.675 ; 128.619,52.675 128.62,52.676 U1.76 ; 128.619,52.675 128.619,57.675 ; 128.619,57.675 128.619,60.107 ; 128.619,60.107 128.619,66.175
  Top Layer w1: 104.175,78.2 C42.2
  Bottom Layer w0.254: v2(89.25,52.75) 89.25,64.65 v2(89.325,64.725) ; pad.1@90.1,84.25 92.45,81.9 92.45,78.175 pad.0@99.625,78.175 ; pad.3 104.691,65.066 105.709,65.066 106.359,65.716 106.359,71.109 pad.2 ; v2(141.78,26.33) 155.36,26.33 v2(156.55,25.14)
VCC5V: C3.2 C40.1 IC3.3 L*.2 LED1.2 Motor1_E.1 Motor2_E.1 Motor4_E.1 Motor5_E.1 R1.2 | length 346
  Top Layer w0.254: R1.2 92.15,71.175 L*.2 ; IC3.3@104.775,72.075 IC3.3
  Top Layer w0.5: LED1.2 90.425,86.25 91.475,85.2 91.475,78.975 87.75,75.25 87.75,68.6 L*.2
  Top Layer w1: Motor5_E.1 87.793,24.243 87.793,26.136 102.25,40.593 v1(102.25,46.525) ; v1(94.725,65.65) L*.2 99.325,68.6 C40.1 101.75,66.775 104.75,69.775 104.75,72.05 IC3.3@104.775,72.075 ; v1(109.1,98.75) 109.1,111.275 113.913,116.088 118.963,116.088 Motor1_E.1 ; v1(140.725,98.75) 140.725,99.876 151.628,110.779 174.957,110.779 176.228,112.05 Motor2_E.1 ; v1(152.725,58.525) 151.925,57.725 151.925,52.609 153.189,51.345 166.78,51.345 175.275,42.85 175.275,40.525 175.85,39.95 Motor4_E.1
  Bottom Layer w1: v1(94.725,65.65) 94.725,54.05 v1(102.25,46.525) ; C40.1 101.75,69 109.1,76.35 v1(109.1,98.75) v1(140.725,98.75) 154.225,98.75 154.225,60.025 v1(152.725,58.525)
VCCBAT: D1.1 Motor1_P.1 Motor1_P.2 Motor1_P.3 Motor1_P.6 Motor1_P.7 Motor2_P.1 Motor2_P.2 Motor2_P.3 Motor2_P.6 Motor2_P.7 Motor3_P.1 Motor3_P.2 Motor3_P.3 Motor3_P.6 Motor3_P.7 Motor4.1 Motor4.2 Motor4.3 Motor4.6 Motor4.7 Motor5_P.1 Motor5_P.2 Motor5_P.3 Motor5_P.6 Motor5_P.7 pad.1@173.9,73.98 | length 277.5
  Bottom Layer w0.254: Motor1_P.2@95.83,113.3 Motor1_P.2 Motor1_P.1 ; Motor3_P.6@168.06,55.27 Motor3_P.6
  Bottom Layer w8: Motor1_P.2@95.772,113.358 95.772,107.818 95.92,107.67 ; 95.92,94.01 95.92,107.67 ; 96.66,43.42 96.74,43.42 106.93,33.23 159.08,33.23 ; 168.656,56.94 159.08,56.94 ; Motor2_P.2@169.398,92.852 168.796,92.25 159.08,92.25 ; Motor4.2@169.428,22.842 159.08,33.19 159.08,33.23 ; pad.1@173.9,73.98 163.35,73.98 159.08,69.71 ; 95.92,107.67 98.32,105.27 159.08,105.27 159.08,92.25 ; 159.08,33.23 159.08,56.94 ; 159.08,56.94 159.08,69.71 ; 159.08,69.71 159.08,92.25
pads on no net: *.7 IC2.2 IC3.2 IC*.2 IC*.9 IC*.12 IC*.13 IC*.14 IC*.15 IC*.16 U1.5 U1.6 U1.7 U1.8 U1.9 U1.10 U1.11 U1.12 U1.23 U1.24 U1.26 U1.27 U1.29 U1.30 U1.32 U1.33 U1.34 U1.35 U1.38 U1.58 U1.59 U1.60 U1.61 U1.62 U1.64 U1.66 U1.67 U1.69 U1.72 U1.73 U1.92 U1.93 U1.126 U1.127
copper on no net:
  other v3: 84.7,20.75 180.09,21.72 129.27,23.16 179.4,38.55 135.92,43.08 85.11,44.48 180.09,56.59 135.92,77.94 180.06,91.73 129.27,93.13 178.7,110.65 85.11,114.48 117.775,114.5 135.93,114.57

## Polygon pours and split planes (outlines as drawn)
GND on Top Layer "Top Layer-No Net" (solid, pour order 5): 83.1,117.6 182.1,117.6 182.1,18.6 83.1,18.6
GND on Bottom Layer "Bottom Layer GND" (solid, pour order 8): 83.1,117.6 182.1,117.6 182.1,18.6 83.1,18.6